# Altium PCB pcb_copy_2021-07-23.pcbdoc
Units mil, origin at the board's own origin, x right, y up, seen from the top; angles counter-clockwise.
Board outline 4872.48 x 2930 mil, 2 copper layers (Top Layer, Bottom Layer); 35 components, 48 nets, 148 pads, 15 vias.
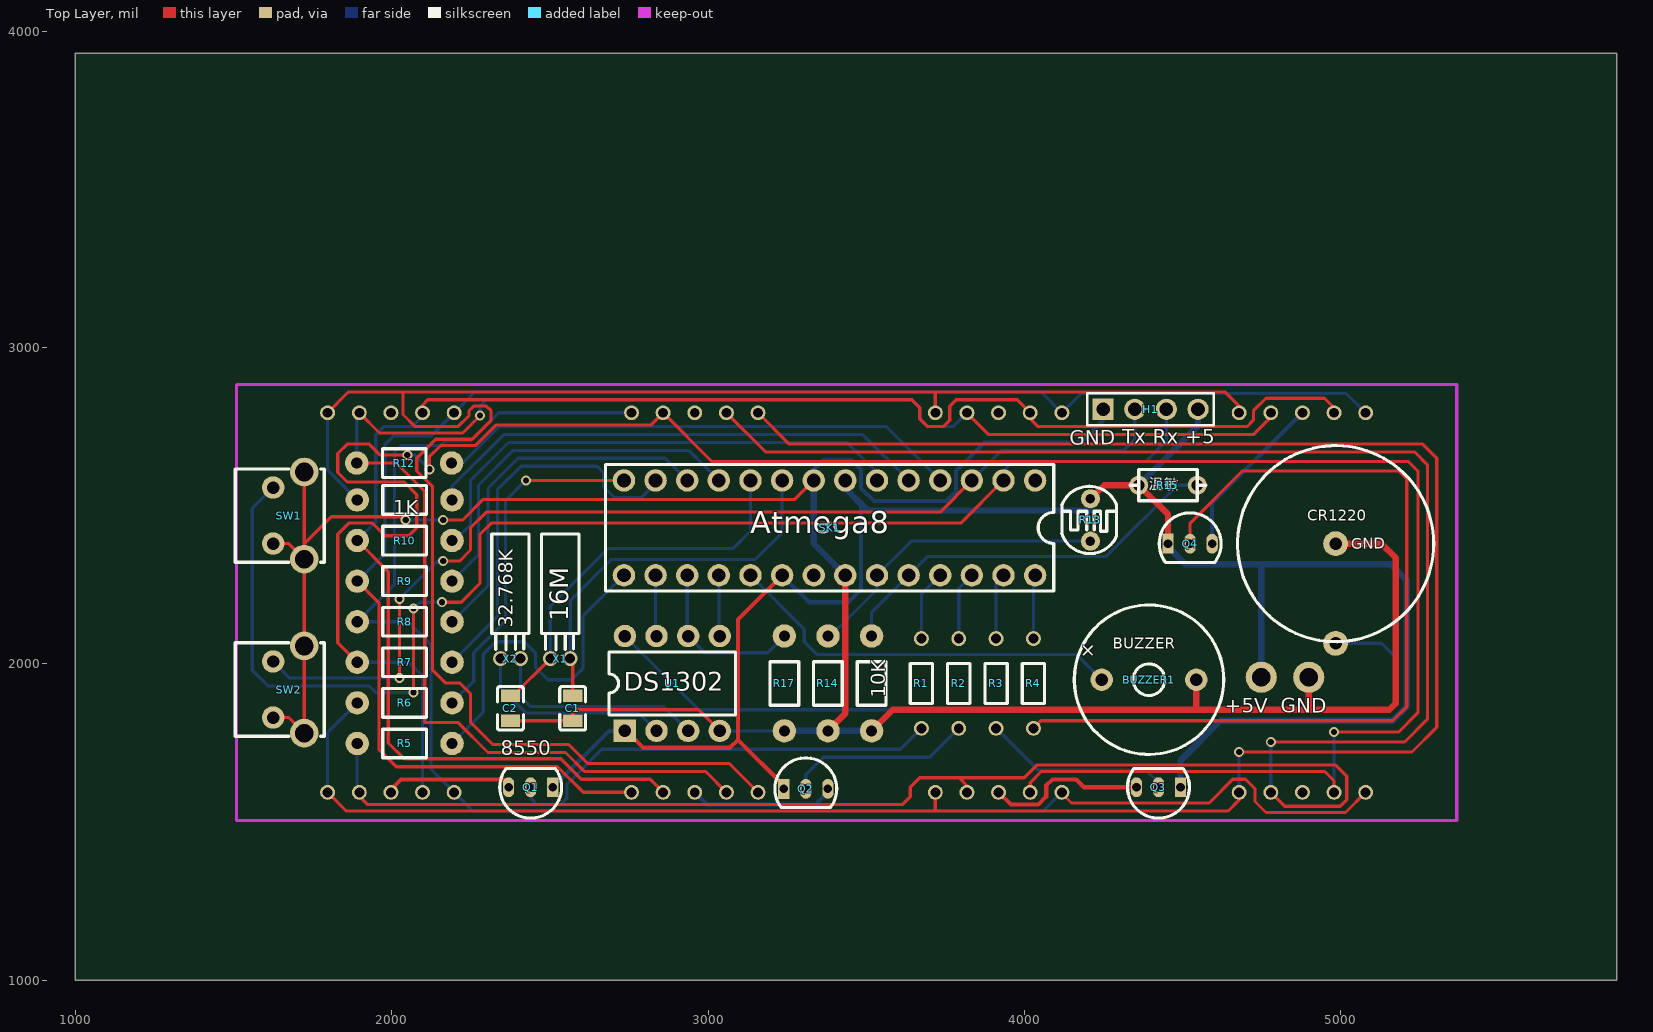
[diagram p0: Top Layer view]
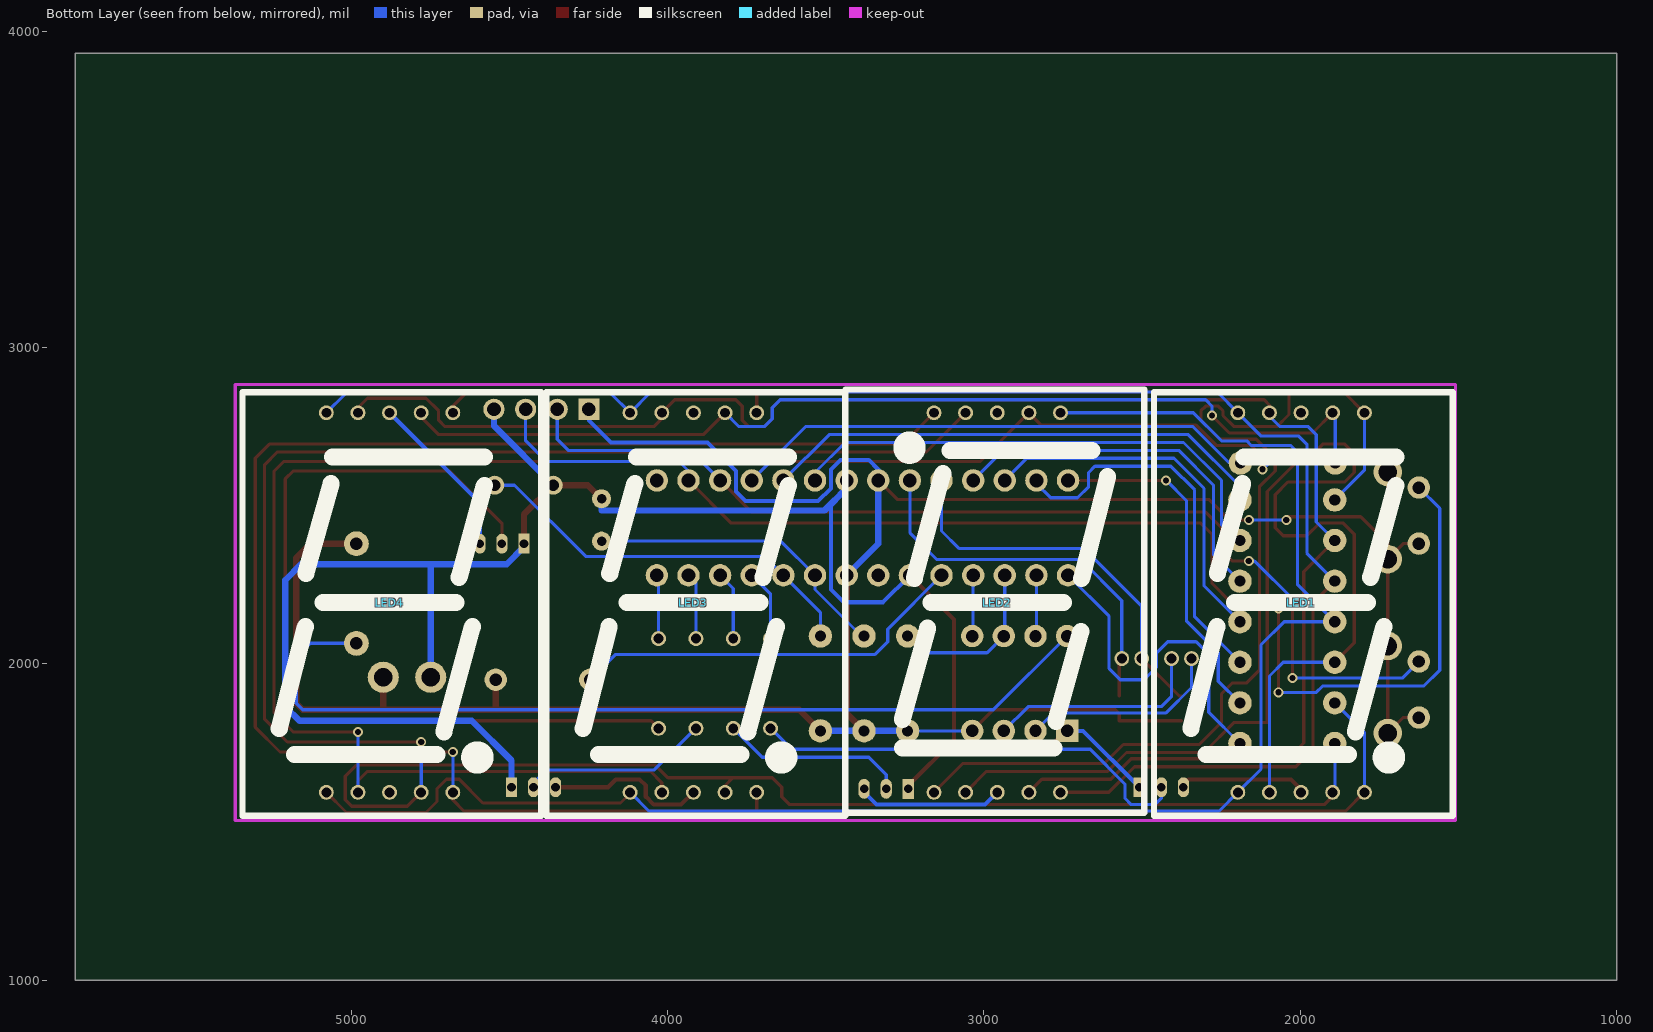
[diagram p1: Bottom Layer view, seen from below]

## Layer stack, top to bottom
Top Layer: signal copper (thickness not stored)
Dielectric: dielectric 12.6, FR-4, Dk 4.8
Bottom Layer: signal copper (thickness not stored)

## Board outline
5872.48,1000 1000,1000 1000,3930 5872.48,3930

## Components (designator, comment, footprint, x,y, rotation, side; value= is the part's Value field where it differs from the comment)
1K "1.8K" RES-TH_BD2.3-L3.7-P7.70-D0.9 2040.71,2518.39 r0 top
10K "22K" RES-TH_BD2.3-L3.7-P7.70-D0.9 3517.09,1938.07 r90 top
BUZZER1 "SUN-12075-12VPA7.6" BUZ-TH_BD12.0-P7.60-D0.6-FD 4394.21,1950 r0 top
C1 "22pF" C0805 2572.21,1859.33 r90 top
C2 "22pF" C0805 2375.36,1859.33 r90 top
H1 "210-91-04GB01" HDR-TH_4P-P2.54-V 4399.21,2805 r0 top
LED1 "FJ11001BH" LED-SEG-TH_10P-L34.0-W24.0-P2.54-S30.48-BL 1997.4,2193.98 r0 bottom
LED2 "FJ11001BH" LED-SEG-TH_10P-L34.0-W24.0-P2.54-S30.48-BL 2958.03,2193.98 r180 bottom
LED3 "FJ11001BH" LED-SEG-TH_10P-L34.0-W24.0-P2.54-S30.48-BL 3918.66,2193.98 r0 bottom
LED4 "FJ11001BH" LED-SEG-TH_10P-L34.0-W24.0-P2.54-S30.48-BL 4879.29,2193.98 r0 bottom
Q1 "S8550_C717454" TO-92-3_L4.9-W3.7-P1.27-L 2439.21,1610 r180 top
Q2 "S8550_C717454" TO-92-3_L4.9-W3.7-P1.27-L 3309.21,1605 r0 top
Q3 "S8550_C717454" TO-92-3_L4.9-W3.7-P1.27-L 4424.21,1610 r180 top
Q4 "S8550_C717454" TO-92-3_L4.9-W3.7-P1.27-L 4524.21,2380 r0 top
R1 "680" RES-TH_BD1.8-L3.2-P7.20-D0.4 3674.57,1938.07 r90 top
R2 "680" RES-TH_BD1.8-L3.2-P7.20-D0.4 3792.68,1938.07 r90 top
R3 "680" RES-TH_BD1.8-L3.2-P7.20-D0.4 3910.79,1938.07 r90 top
R4 "680" RES-TH_BD1.8-L3.2-P7.20-D0.4 4028.9,1938.07 r90 top
R5 "1.8K" RES-TH_BD2.3-L3.7-P7.70-D0.9 2040.71,1748.31 r0 top
R6 "1.8K" RES-TH_BD2.3-L3.7-P7.70-D0.9 2040.71,1876.65 r0 top
R7 "1.8K" RES-TH_BD2.3-L3.7-P7.70-D0.9 2040.71,2005 r0 top
R8 "1.8K" RES-TH_BD2.3-L3.7-P7.70-D0.9 2040.71,2133.35 r0 top
R9 "1.8K" RES-TH_BD2.3-L3.7-P7.70-D0.9 2040.71,2261.69 r0 top
R10 "1.8K" RES-TH_BD2.3-L3.7-P7.70-D0.9 2040.71,2390.04 r0 top
R12 "1.8K" RES-TH_BD2.3-L3.7-P7.70-D0.9 2039.21,2635 r0 top
R13 "GL5537-2" RES-TH_L5.1-W4.3-P3.40-D0.5 4209.21,2455 r0 top
R14 "22k" RES-TH_BD2.3-L3.7-P7.70-D0.9 3379.29,1938.07 r90 top
R15 "10KΩ ±5%" RES-TH_BD2.5-L4.7-P8.70-D0.5 4454.21,2565 r0 top
R17 "22K" RES-TH_BD2.3-L3.7-P7.70-D0.9 3241.5,1938.07 r90 top
SK1 "IC seat" DIP-28-300MIL-DZ 3384.21,2430 r180 top
SW1 "TS6643ZJ" SW-TH_TS6643ZJ 1674.29,2468.98 r270 top
SW2 "TS6643ZJ" SW-TH_TS6643ZJ 1674.29,1918.98 r270 top
U1 "DS1302N" DIP-8_L9.7-W6.4-P2.54-LS7.6-BL 2887.16,1938.07 r0 top
X1 "16MHz" OSC-TH_BD3.1-P0.8-D0.3 2532.84,2016.81 r270 top
X2 "32.768KHz" OSC-TH_BD3.1-P0.8-D0.3 2375.36,2016.81 r270 top

## Footprints (in the part's own frame and the unit in brackets; to place one, negate y for a bottom-side part, rotate by r counter-clockwise, add the part's x,y. Pads: shape width x height; smd on the part's side, far side on the other; paste and mask are expansions set on the pad)
BUZ-TH_BD12.0-P7.60-D0.6-FD [mm]
  round 1.8 hole 1: 1(-3.8,0) 2(3.8,0)
  silkscreen extent -6,-6 6,6
C0805 [mm]
  rect 1x1.55 smd: 1(-1,0) 2(1,0)
  silkscreen extent -1.75,-1.04 1.75,1.04
DIP-8_L9.7-W6.4-P2.54-LS7.6-BL [mm]
  rect 1.8x1.8 hole 1: 1(-3.81,-3.81)
  round 1.8 hole 1: 2(-1.27,-3.81) 3(1.27,-3.81) 4(3.81,-3.81) 5(3.81,3.81) 6(1.27,3.81) 7(-1.27,3.81) 8(-3.81,3.81)
  silkscreen extent -5.08,-2.53 5.08,2.53
DIP-28-300MIL-DZ [mm]
  round 1.8 hole 1.1: 1(-16.51,-3.81) 2(-16.51,3.81) 3(-13.97,-3.81) 4(-13.97,3.81) 5(-11.43,-3.81) 6(-11.43,3.81) 7(-8.89,-3.81) 8(-8.89,3.81) 9(-6.35,-3.81) 10(-6.35,3.81) 11(-3.81,-3.81) 12(-3.81,3.81) 13(-1.27,-3.81) 14(-1.27,3.81) 15(1.27,-3.81) 16(1.27,3.81) 17(3.81,-3.81) 18(3.81,3.81) 19(6.35,-3.81) 20(6.35,3.81) 21(8.89,-3.81) 22(8.89,3.81) 23(11.43,-3.81) 24(11.43,3.81) 25(13.97,-3.81) 26(13.97,3.81) 27(16.51,-3.81) 28(16.51,3.81)
  silkscreen extent -18,-5.08 18,5.08
HDR-TH_4P-P2.54-V [mm]
  rect 1.7x1.7 hole 1.1: 1(-3.81,0)
  round 1.7 hole 1.1: 2(-1.27,0) 3(1.27,0) 4(3.81,0)
  silkscreen extent -5.08,-1.27 5.08,1.27
LED-SEG-TH_10P-L34.0-W24.0-P2.54-S30.48-BL [mm]
  round 1.2 hole 0.8: 1(5.08,15.24) 2(2.54,15.24) 3(0,15.24) 4(-2.54,15.24) 5(-5.08,15.24) 6(-5.08,-15.24) 7(-2.54,-15.24) 8(0,-15.24) 9(2.54,-15.24) 10(5.08,-15.24)
  silkscreen extent -12.19,-16.89 11.81,17.11
OSC-TH_BD3.1-P0.8-D0.3 [mm]
  round 1.2 hole 0.8: 1(0,0.8) 2(0,-0.8)
  silkscreen extent -10,-1.5 -0.7,1.5
RES-TH_BD1.8-L3.2-P7.20-D0.4 [mm]
  round 1.2 hole 0.8: 1(-3.6,0) 2(3.6,0)
  silkscreen extent -1.6,-0.9 1.6,0.9
RES-TH_BD2.3-L3.7-P7.70-D0.9 [mil]
  round 74 hole 35.4: 1(-150,0) 2(150,0)
  silkscreen extent -69,-45 69,45
RES-TH_BD2.5-L4.7-P8.70-D0.5 [mil]
  round 60 hole 35.98: 1(-92.52,0) 2(92.51,0)
  silkscreen extent -120,-49 120,49
RES-TH_L5.1-W4.3-P3.40-D0.5 [mil]
  round 60 hole 30: 1(0,66.93) 2(0,-66.93)
  silkscreen extent -91,-106 83,106
SW-TH_TS6643ZJ [mm]
  round 1.8 hole 1: 1(-2.25,-1.25) 2(2.25,-1.25)
  round 2.3 hole 1.5: 3(-3.5,1.25) 4(3.5,1.25)
  silkscreen extent -3.75,-4.3 3.75,2.85
TO-92-3_L4.9-W3.7-P1.27-L [mm]
  rect 0.9x1.6 hole 0.7: 1(-1.77,0)
  oval 0.9x1.6 hole 0.7: 2(0,0) 3(1.77,0)
  silkscreen extent -2.48,-1.5 2.48,2.48

## Free pads (board coordinates)
  round 78.74 hole 39.37: 1(4984.21,2065) 2(4984.21,2379.96)
  round 98.42 hole 59.06: 3(4899.22,1957.76) 4(4749.22,1957.76)

## Via types
v1: diameter 31.5, hole 19.69, Top Layer to Bottom Layer, 15 vias

## Nets (pads, with @x,y where several pads share a name; then routed paths per layer and width w, separated by ;. In a path a pad name is that pad's centre, name@x,y a point inside that pad or via, vN(x,y) a via of type N, cw(c..) or ccw(c..) an arc to the next point about the centre after c; other vN are vias at no path point)
1: LED1.7 LED2.7 LED3.7 LED4.7 R12.1 | length 5298.7
  Top Layer w10: R12.1 2014.21,2635 2104.21,2545 2104.21,1815 2209.21,1815 2304.21,1720 2549.21,1720 2609.21,1660 2992.01,1660 LED2.7 ; LED1.7 1961.41,2730 2224.21,2730 v1(2279.21,2785) ; LED3.7@3818.61,2794 3887.61,2725 4724.21,2725 4779.31,2780.1 LED4.7
  Bottom Layer w10: R12.1 1889.21,2785.79 LED1.7 ; v1(2279.21,2785) 2279.21,2815 2299.21,2835 3644.21,2835 3669.21,2810 3669.21,2775 3694.21,2750 3774.61,2750 LED3.7@3818.61,2794
2: 1K.1 LED1.6 LED2.6 LED3.6 LED4.6 | length 5983.8
  Top Layer w10: LED1.6 1863.41,2860 4634.21,2860 4679.31,2814.9 LED4.6 ; 2035.61,2860 2035.61,2788.6 2074.21,2750 2209.21,2750 2244.21,2785 2244.21,2800 2259.21,2815 2299.21,2815 2314.21,2800 2314.21,2770 2254.21,2710 2139.21,2710 2079.21,2650 2079.21,2610 2129.21,2560 2129.21,1980 2169.21,1940 2214.21,1940 2249.21,1905 2249.21,1815 2319.21,1745 2559.21,1745 2619.21,1685 3067.01,1685 LED2.6 ; LED3.6 3718.66,2860
  Bottom Layer w10: LED1.6 1797.4,2611.7 1K.1
3: LED1.4 LED2.4 LED3.4 LED4.4 R5.1 | length 7563.7
  Top Layer w10: LED1.4 1897.41,1581.8 1924.21,1555 3614.21,1555 3639.21,1580 3639.21,1610 3669.21,1640 3794.21,1640 3818.61,1615.6 LED3.4@3818.61,1594 ; LED2.4 3182.01,2670 5234.21,2670 5274.21,2630 5274.21,1825 5202.21,1753 v1(4779.29,1753.03) ; 3787.01,1640 3999.21,1640 4039.21,1680 4984.21,1680 5019.21,1645 5019.21,1570 4999.21,1550 4823.31,1550 LED4.4
  Bottom Layer w10: R5.1 1890.71,1600.67 LED1.4 ; LED4.4 v1(4779.29,1753.03)
4: LED1.2 LED2.2 LED3.2 LED4.2 R7.1 | length 7692.4
  Top Layer w10: R7.1 1829.21,2066.5 1829.21,2410 1864.21,2445 1939.21,2445 1979.21,2405 2054.21,2405 2079.21,2430 2079.21,2535 2039.21,2575 1859.21,2575 1829.21,2605 1829.21,2665 1859.21,2695 1929.21,2695 1964.21,2660 v1(2049.21,2660) ; v1(2119.21,2615) 2119.21,2655 2154.21,2690 2264.21,2690 2329.21,2755 2819.01,2755 LED2.2 3012.01,2640 5214.21,2640 5244.21,2610 5244.21,1845 5183.71,1784.5 v1(4979.29,1784.53) ; LED3.2@4018.61,1594 4018.61,1624.4 4054.21,1660 4949.21,1660 4979.31,1629.9 LED4.2
  Bottom Layer w10: R7.1 2054.21,2005 2097.4,1961.81 LED1.2 ; v1(2049.21,2660) 2074.21,2660 v1(2119.21,2615) ; LED4.2 v1(4979.29,1784.53)
5: LED1.1 LED2.1 LED3.1 LED4.1 R8.1 | length 5217.5
  Top Layer w10: LED3.1@4118.61,1594 4118.61,1590.5 4149.21,1560 4584.21,1560 4659.21,1635 4699.21,1635 4729.21,1605 4729.21,1565 4764.21,1530 5015.31,1530 LED4.1
  Bottom Layer w10: LED2.1 2338.21,2794 2249.21,2705 2169.21,2705 2154.21,2690 2029.21,2690 2009.21,2670 2009.21,2251.8 R8.1 2050.91,2133.3 2124.21,2060 2124.21,1667.17 LED1.1 2256.41,1535 4059.61,1535 LED3.1@4118.61,1594
6: LED1.9 LED2.9 LED3.9 LED4.9 R10.1 | length 5316.1
  Top Layer w10: R10.1 1989.21,2291.5 1989.21,1750 2039.21,1700 2534.21,1700 2599.21,1635 2817.01,1635 LED2.9 ; LED1.9 2097.41,2818.2 2114.21,2835 3644.21,2835 3669.21,2810 3669.21,2775 3694.21,2750 3744.21,2750 3764.21,2770 3764.21,2815 3784.21,2835 3977.61,2835 4018.61,2794 4018.61,2775.5 4044.21,2750 4704.21,2750 4724.21,2770 4724.21,2800 4764.21,2840 4949.21,2840 4979.31,2809.9 LED4.9
  Bottom Layer w10: R10.1 1949.21,2448.5 1949.21,2725 1974.21,2750 2064.21,2750 2097.41,2783.2 LED1.9
7: LED1.10 LED2.10 LED3.10 LED4.10 R9.1 | length 5131.5
  Top Layer w10: R9.1 1959.21,2193.2 1959.21,1730 2014.21,1675 2524.21,1675 2605.21,1594 LED2.10
  Bottom Layer w10: R9.1 1979.21,2350.2 1979.21,2695 2004.21,2720 2123.41,2720 LED1.10 2263.41,2860 4052.61,2860 4118.61,2794 4179.61,2855 5018.31,2855 LED4.10
8: LED1.5 LED2.5 LED3.5 LED4.5 R6.1 | length 7165.9
  Top Layer w10: LED1.5 1856.41,1535 4644.21,1535 4679.31,1570.1 LED4.5 ; LED2.5 3257.01,2695 5259.21,2695 5304.21,2650 5304.21,1800 5225.71,1721.5 v1(4679.29,1721.53) ; 3718.66,1535 LED3.5
  Bottom Layer w10: LED1.5 1797.4,1783.34 R6.1 ; LED4.5 v1(4679.29,1721.53)
+5V: H1.4 pad.4 Q1.1 Q2.1 Q3.1 Q4.1 R13.1 R15.1 SK1.13 SK1.18 U1.1 | length 6165.6
  Top Layer w13: U1.1@2737.11,1788.1 2741.11,1788.1 2794.21,1735 3069.21,1735 3094.21,1760 ; SK1.18 3094.21,2140 3094.21,1760 ; Q2.1 3239.53,1614.69 3094.21,1760
  Top Layer w20: R13.1 4252.28,2565 R15.1 4454.53,2472.18 Q4.1
  Bottom Layer w13: Q1.1 2686.97,1788.07 U1.1 ; SK1.18 3319.21,2195 3444.21,2195 3484.21,2235 3484.21,2510 3434.21,2560 SK1.13
  Bottom Layer w20: SK1.13 3434.21,2555 3504.21,2485 4209.21,2485 R13.1 ; R15.1 4549.21,2752.51 H1.4 ; Q4.1 4454.53,2369.69 4509.21,2315 5159.21,2315 5209.21,2265 5209.21,1865 5164.21,1820 4619.21,1820 4493.9,1694.69 Q3.1 ; pad.4 4749.21,2315
BTN1: H1.3 SK1.3 SW1.1 | length 4216.8
  Top Layer w10: v1(2069.21,1910) v1(2069.21,2175) ; v1(2159.21,2195) 2219.21,2195 2279.21,2255 2279.21,2410 2314.21,2445 3799.21,2445 SK1.3
  Bottom Layer w10: SW1.1 1559.21,2491.7 1559.21,1980 1609.21,1930 1929.21,1930 1949.21,1910 v1(2069.21,1910) ; v1(2069.21,2175) 2089.21,2195 v1(2159.21,2195) ; SK1.3 3934.21,2610 3964.21,2640 4384.21,2640 4449.21,2705 H1.3
BTN2: H1.2 SK1.5 SW2.1 | length 3341.1
  Top Layer w10: v1(2024.21,1955) v1(2024.21,2205) ; v1@2162.71,2325 2214.21,2325 2249.21,2360 2249.21,2430 2299.21,2480 3734.21,2480 SK1.5
  Bottom Layer w10: SW2.1 1677.64,1955 v1(2024.21,1955) ; v1(2024.21,2205) 2144.21,2325 v1(2162.75,2325) ; SK1.5 3929.21,2675 4314.21,2675 4349.21,2710 H1.2
BUTTERY: pad.1 U1.8 | length 2895.5
  Bottom Layer w10: U1.8 2970.23,1855 5154.21,1855 5174.21,1875 5174.21,2020 5129.21,2065 pad.1
BUZZER: BUZZER1.1 SK1.20 | length 1270.5
  Bottom Layer w10: SK1.20 3304.21,2110 3304.21,2070 3344.21,2030 4164.61,2030 BUZZER1.1
CLK: SK1.26 U1.7 | length 193.2
  Bottom Layer w10: SK1.26 2834.21,2091.02 U1.7
D1: R1.2 SK1.8 | length 224.9
  Bottom Layer w10: R1.2 3674.57,2220.35 SK1.8
D2: R2.2 SK1.6 | length 217.4
  Bottom Layer w10: R2.2 3792.68,2238.46 SK1.6
D3: R3.2 SK1.4 | length 209.9
  Bottom Layer w10: R3.2 3910.79,2256.58 SK1.4
D4: R4.2 SK1.2 | length 202.4
  Bottom Layer w10: R4.2 4028.9,2274.68 SK1.2
DAT: R17.2 SK1.24 U1.6 | length 541.5
  Bottom Layer w10: SK1.24 2934.21,2091.02 U1.6 ; U1.6@2937.11,2088.1 2990.21,2035 3188.41,2035 R17.2
GND: 10K.1 BUZZER1.2 C1.1 C2.1 H1.1 pad.2 pad.3 R14.1 R17.1 SK1.14 SK1.15 SW1.2 SW1.3 SW1.4 SW2.2 SW2.3 SW2.4 U1.4 | length 8662.5
  Top Layer w10: SW2.2 1674.28,1830.4 SW2.4 SW1.4 ; SW1.2 1674.28,2380.4 SW1.4 ; SW1.3 SW1.4 ; v1(2044.21,2455) 2044.21,2465 1809.21,2465 1723.5,2379.29 SW1.4 ; v1@2162.71,2455 2224.21,2455 2289.21,2520 3274.21,2520 SK1.15 ; C2.1 C1.1 2572.21,1842.99 2584.21,1855 2970.23,1855 U1.4
  Top Layer w20: R14.1 3434.21,1842.99 SK1.14 ; 10K.1 3584.01,1855 5154.21,1855 5174.21,1875 5174.21,2335 5129.21,2380 pad.2 ; 4543.82,1855 BUZZER1.2 ; 4899.21,1855 pad.3
  Bottom Layer w10: v1(2044.21,2455) v1(2162.75,2455) ; U1.4 R17.1
  Bottom Layer w13: SK1.15 3334.21,2615 3364.21,2645 3454.21,2645 3484.21,2615 3484.21,2555 3524.21,2515 3754.21,2515 3784.21,2545 3784.21,2610 3874.21,2700 4179.21,2700 4249.21,2770 H1.1
  Bottom Layer w20: R17.1 10K.1 ; SK1.15 3334.21,2380 SK1.14
LIGHT: R13.2 R14.2 SK1.12 | length 980.5
  Bottom Layer w10: R14.2 3387.31,2088.1 3534.21,2235 SK1.12 3642.28,2388.07 R13.2
Q1_3: LED1.3 Q1.3 | length 410.5
  Top Layer w13: LED1.3 1997.41,1603.2 2029.21,1635 2354.21,1635 2369.53,1619.69 Q1.3
Q2_2: Q2.2 R2.1 | length 589.1
  Bottom Layer w10: Q2.2 3309.21,1650 3364.21,1705 3701.31,1705 R2.1
Q2_3: LED2.8 Q2.3 | length 463.8
  Bottom Layer w13: LED2.8 2997.01,1555 3339.21,1555 3378.91,1594.7 Q2.3
Q3_2: Q3.2 R3.1 | length 599.4
  Bottom Layer w10: R3.1 4042.11,1665 4384.21,1665 4424.21,1625 Q3.2
Q3_3: LED3.3 Q3.3 | length 516.1
  Top Layer w13: LED3.3@3918.61,1594 3957.61,1555 4044.21,1555 4069.21,1580 4069.21,1615 4089.21,1635 4164.21,1635 4189.21,1610 Q3.3
Q4_2: Q4.2 R4.1 | length 2757.5
  Top Layer w10: R4.1 4052.51,1820 5164.21,1820 5209.21,1865 5209.21,2585 5184.21,2610 4689.21,2610 4524.21,2445 Q4.2
Q4_3: LED4.8 Q4.3 | length 532.2
  Bottom Layer w13: Q4.3 4593.9,2508.59 LED4.8
R1_1: Q1.2 R1.1 | length 1405
  Bottom Layer w10: Q1.2 2439.21,1575 2459.21,1555 2534.21,1555 2554.21,1575 2554.21,1620 2664.21,1730 3608.31,1730 R1.1
R5_2: R5.2 SK1.28 | length 1093.5
  Bottom Layer w10: R5.2 2289.21,1846.8 2289.21,2030 2329.21,2070 2419.21,2070 2454.21,2035 2454.21,1990 2494.21,1950 2569.21,1950 2604.21,1985 2604.21,2150 SK1.28
R6_2: R6.2 SK1.27 | length 1110.1
  Top Layer w10: v1(2424.21,2580) SK1.27
  Bottom Layer w10: R6.2 2259.21,1945.15 2259.21,2035 2359.21,2135 2359.21,2515 v1(2424.21,2580)
R7_2: R7.2 SK1.25 | length 1231.9
  Bottom Layer w10: R7.2 2334.21,2148.5 2334.21,2550 2409.21,2625 2649.21,2625 2669.21,2605 2669.21,2560 2704.21,2525 2789.21,2525 2834.21,2570 SK1.25
R8_2: R8.2 SK1.23 | length 1167.1
  Bottom Layer w10: R8.2 2304.21,2246.8 2304.21,2555 2399.21,2650 2864.21,2650 SK1.23
R9_2: R9.2 SK1.21 | length 1182.8
  Bottom Layer w10: R9.2 2274.21,2345.2 2274.21,2565 2384.21,2675 2939.21,2675 SK1.21
R10_2: R10.2 SK1.11 | length 1618.3
  Bottom Layer w10: R10.2 2199.21,2390 2249.21,2440 2249.21,2580 2369.21,2700 3439.21,2700 3534.21,2605 SK1.11
R11_2: 1K.2 SK1.9 | length 1614.4
  Bottom Layer w10: 1K.2 2190.71,2561.5 2354.21,2725 3489.21,2725 SK1.9
R12_2: R12.2 SK1.7 | length 1663.1
  Bottom Layer w10: R12.2 2224.21,2635 2339.21,2750 3564.21,2750 SK1.7
RST: SK1.22 U1.5 | length 193.2
  Bottom Layer w10: SK1.22 3034.21,2091.02 U1.5
S$11: 
S$13: 
S$90: 
S$92: 
S$96: 
TEMP: 10K.2 R15.2 SK1.10 | length 1271
  Bottom Layer w10: 10K.2 3517.09,2162.88 SK1.10 3694.21,2340 4259.21,2340 4484.21,2565 R15.2
X1_1: C1.2 SK1.17 X1.1 | length 1228.6
  Top Layer w10: X1.1 2572.21,2008.94 C1.2
  Bottom Layer w10: X1.1 2564.34,2200.12 2694.21,2330 3149.21,2330 3234.21,2415 SK1.17
X1_2: C2.2 SK1.19 X1.2 | length 1231.6
  Top Layer w10: C2.2 2383.23,1898.7 X1.2
  Bottom Layer w10: X1.2 2501.31,2182.1 2684.21,2365 3079.21,2365 3134.21,2420 SK1.19
X2_1: U1.3 X2.1 | length 695
  Bottom Layer w10: X2.1@2406.81,2016.8 2406.81,1897.4 2439.21,1865 2860.21,1865 U1.3@2937.11,1788.1
X2_2: U1.2 X2.2 | length 641.6
  Bottom Layer w10: X2.2@2343.81,2016.8 2343.81,1925.4 2424.21,1845 2780.21,1845 U1.2@2837.11,1788.1
pads on no net: LED1.8 LED2.3 LED3.8 LED4.3 SK1.1 SK1.16

## Silkscreen, mask and mechanical layers (free items; w line width, h text height)
Top Overlay:
  circle w10: c4984.21,2380 r310.04
  text "Tx Rx" at 4309.21,2680 h80
  text "+5" at 4509.21,2680 h80
  text "GND" at 4144.21,2675 h80 r1
  text "温敏" at 4394.21,2540 h60 r359
  text "CR1220" at 4894.21,2440 h60
  text "Atmega8" at 3134.21,2390 h120
  text "GND" at 5034.21,2350 h60 r1
  text "16M" at 2579.21,2135 h100 r90
  text "32.768K" at 2399.21,2115 h75 r90
  text "BUZZER" at 4279.21,2035 h60
  text "DS1302" at 2734.21,1895 h100
  text "+5V  GND" at 4634.21,1830 h80
  text "8550" at 2344.21,1695 h80
Document:
  text "这个数码管反向安装" at 2839.21,3230 h200
  text "V" at 2929.21,2970 h200 r180

## Text inside footprints (layer, text, board x,y; h text height)
BUZZER1: Top Overlay "+" at 4236.9,2037.18 h50 r135